# Altium PCB GardenSense_RevB.PcbDoc
Units mil, origin at the board's own origin, x right, y up, seen from the top; angles counter-clockwise.
Board outline 10012 x 650 mil, 2 copper layers (Top Layer, Bottom Layer); 30 components, 29 nets, 211 pads, 33 vias.
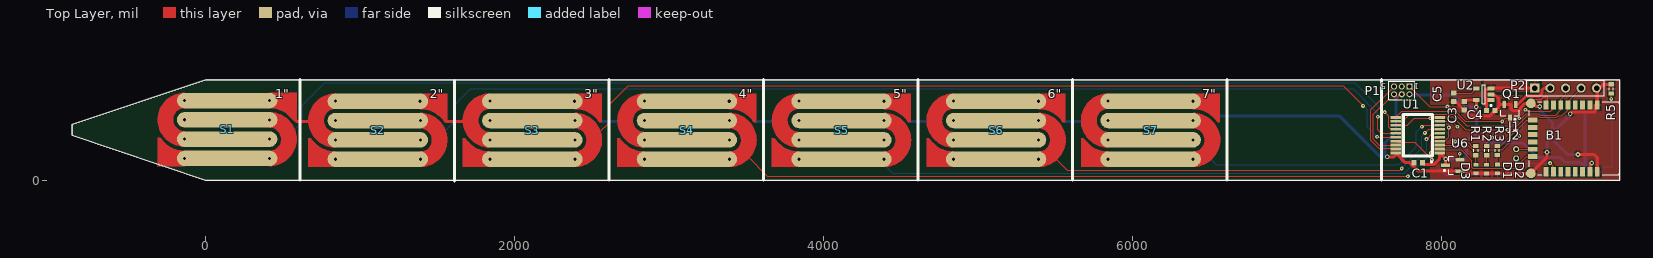
[diagram p0: Top Layer view]
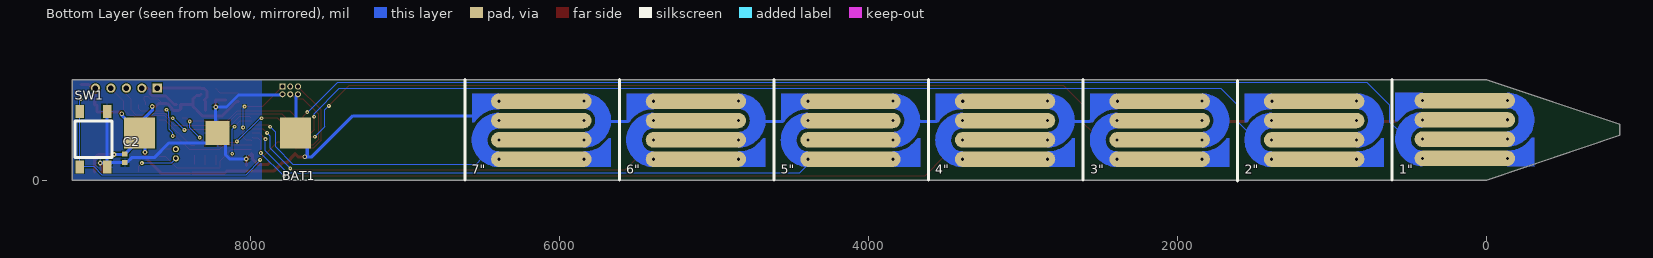
[diagram p1: Bottom Layer view, seen from below]

## Layer stack, top to bottom
Top Solder: solder mask 0.4, Solder Resist, Dk 3.5
Top Layer: signal copper 1.4
Dielectric 1: dielectric 12.6, FR-4, Dk 4.8
Bottom Layer: signal copper 1.4
Bottom Solder: solder mask 0.4, Solder Resist, Dk 3.5

## Board outline
9150,0 0,0 -862,290 -862,360 0,650 9150,650

## Design rules (kind name [scope] priority, off if disabled: settings)
Clearance [All] p1: gap=7
HoleSize [All] p1: absolutevalues=TRUE maxlimit=100 minlimit=10 maxpercent=80.000 minpercent=20.000
MinimumSolderMaskSliver [All] p1: minsoldermaskwidth=7
PolygonConnect [All] p1: connectstyle=Relief reliefconductorwidth=10 reliefentries=4 polygonreliefangle="90 Angle" airgapwidth=10
RoomDefinition GardenSense_RevB [InComponentClass('GardenSense_RevB')] p1: confinementstyle=ConfineIn formatcopy=TRUE lockcomponents=FALSE outline -860,0 9150,0 9150,650 -860,650
RoutingVias [All] p1: holewidth=15 width=30 viastyle="Through Hole" minholewidth=10 minwidth=25 maxholewidth=28 maxwidth=50
SilkToSilkClearance [All] p1 off: silktosilkclearance=10
SilkToSolderMaskClearance [IsPad] p1 off: minsilkscreentomaskgap=10 clearancetoexposedcopper=TRUE
SolderMaskExpansion [All] p1: expansion=4
Width Width_VCC [InNet('VCC')] p1: maxlimit=20 minlimit=8 preferedwidth=20
Width Width_GND [InNet('GND')] p2: maxlimit=20 minlimit=8 preferedwidth=20 minimp=50.000000 maximp=50.000000 favimp=50.000000
Width [All] p3: maxlimit=20 minlimit=8 preferedwidth=20 minimp=50.000000 maximp=50.000000 favimp=50.000000
26 further rules are at their usual default settings.

## Components (designator, comment, footprint, x,y, rotation, side; value= is the part's Value field where it differs from the comment)
B1 "RN4020" "RN4020 MODULE-24" 8790,270 r270 top
BAT1 "2032 Coin Cell" KEYSTONE_3002_2032_COINCELL 7705,305 r0 bottom
C1 "Cap Semi" 1608[0603] 7846,113 r0 top
C2 "Cap Semi" 1608[0603] 8810,140 r270 bottom
C3 "Cap Semi" 1608[0603] 8145,480 r90 top
C4 "Cap Semi" 1608[0603] 8315,450 r180 top
C5 "Cap Semi" 1608[0603] 8075,535 r90 top
D1 "LED" 603_ 8220,71.46 r180 top
D2 "LED" 603_ 8289,70.46 r180 top
D3 "LED" 603_ 8359,72.46 r180 top
J1 "TestPoint" TESTPOINT 8480,200 r0 top
J2 "TestPoint" TESTPOINT 8480,140 r0 top
P1 "MHDR2X3" MHDR2X3 7790,605 r180 top
P2 "Header 5" HDR1X5 8600,595 r0 top
Q1 "AO3420" SOT23_N 8440,445 r270 top
R1 "Res3" J1-0603 8220,190.46 r270 top
R2 "Res3" J1-0603 8290,190.46 r270 top
R3 "Res3" J1-0603 8358,191.46 r270 top
R5 "Res3" J1-0603 9095,590 r270 top
S1 "MoistureSensor" MOISTURE_2 -310,90 r0 top
S2 "MoistureSensor" MOISTURE_2 665,85 r0 top
S3 "MoistureSensor" MOISTURE_2 1665,85 r0 top
S4 "MoistureSensor" MOISTURE_2 2665,85 r0 top
S5 "MoistureSensor" MOISTURE_2 3665,85 r0 top
S6 "MoistureSensor" MOISTURE_2 4665,85 r0 top
S7 "MoistureSensor" MOISTURE_2 5665,85 r0 top
SW1 "PUSHBUTTON" PUSHBUTTON 8925,85 r0 bottom
U1 "PIC16LF1559" SSOP-20 7985,175 r180 top
U2 "MIC5205" SOT23-5_N 8270,555 r180 top
U6 "MCP9700" SOT23_M 8070,95 r180 top

## Footprints (in the part's own frame and the unit in brackets; to place one, negate y for a bottom-side part, rotate by r counter-clockwise, add the part's x,y. Pads: shape width x height; smd on the part's side, far side on the other; paste and mask are expansions set on the pad)
603_ [mm]
  rect 0.8x0.6 smd: 1(0,-0.725) 2(0,0.725)
1608[0603] [mm] "Chip Capacitor, Body 1.6x0.8mm, IPC High Density"
  rect 0.8x0.9 smd: 1(-0.7,0) 2(0.7,0)
  body extent -0.87,-0.48 0.87,0.48, height 1.3
HDR1X5 [mm] "Connector; Header; 5 Position"
  rect 1.5x1.5 hole 0.9: 1(0,0)
  round 1.5 hole 0.9: 2(2.54,0) 3(5.08,0) 4(7.62,0) 5(10.16,0)
  silkscreen extent -1.27,-1.27 11.43,1.27
J1-0603 [mm] "Chip Resistor, Body 1.6x0.8mm, IPC High Density"
  rect 0.7x0.9 smd: 1(-0.75,0) 2(0.75,0)
  silkscreen extent -0.2,-0.35 0.2,0.35, body extent -0.85,-0.48 0.85,0.48, height 0.9
KEYSTONE_3002_2032_COINCELL [mm]
  rect 3.96x3.96 smd: 1(12.825,0)
  rect 5.08x5.08 smd: 2(0,0) 2(25.65,0)
MHDR2X3 [mm] "Connector; Header; 3x2 Position"
  rect 1x1 hole 0.6: 1(0,0)
  round 1 hole 0.6: 2(0,1.27) 3(1.27,0) 4(1.27,1.27) 5(2.54,0) 6(2.54,1.27)
  silkscreen extent -0.9,-0.9 3.44,2.17
MOISTURE_2 [mil]
  round 30 hole 20: 0(175,175.13) 0(175.01,425.36) 0(723.64,424.77) 0(725,175) 1(175,300) 1(175,49.88) 1(725,49.64) 1(725,299.87)
  oval 650x100 smd paste-1000: 0(449.93,424.51) 0(450,175) 1(450,50) 1(450,300)
  oval 650x100 smd far side paste-1000: 0(449.93,424.51) 0(450,175) 1(450,50) 1(450,300)
  Top Layer region: 175,100 91.86,118.66 26.27,173.04 26.27,173.04 15.67,184.64 0,184.64 0,175 0,0 175,0
  Top Layer region: 725,349.75 812.05,325.67 875.92,261.8 900,174.75 900,174.75 875.92,87.7 812.05,23.83 725,-0.25 725,-0.25 725,99.75 753.95,105.02 778.51,121.24 794.73,145.79 800,174.75 800,174.75 789.46,211.9 762.15,239.21 725,249.75 725,249.75
  Top Layer region: 175,125.25 87.95,149.33 24.08,213.2 0,300.25 0,300.25 24.08,387.3 87.95,451.17 175,475.25 175,475.25 175,375.25 146.05,369.98 121.49,353.76 105.27,329.21 100,300.25 100,300.25 110.54,263.1 137.85,235.79 175,225.25 175,225.25
  Top Layer region: 723.64,374.66 809.98,354.39 876.55,295.78 876.56,295.78 882.97,290.02 898.64,290.02 898.64,299.66 898.64,474.66 723.64,474.66
  Bottom Layer region: 175,100 91.86,118.66 26.27,173.04 26.27,173.04 15.67,184.64 0,184.64 0,175 0,0 175,0
  Bottom Layer region: 725,349.75 812.05,325.67 875.92,261.8 900,174.75 900,174.75 875.92,87.7 812.05,23.83 725,-0.25 725,-0.25 725,99.75 753.95,105.02 778.51,121.24 794.73,145.79 800,174.75 800,174.75 789.46,211.9 762.15,239.21 725,249.75 725,249.75
  Bottom Layer region: 175,125.25 87.95,149.33 24.08,213.2 0,300.25 0,300.25 24.08,387.3 87.95,451.17 175,475.25 175,475.25 175,375.25 146.05,369.98 121.49,353.76 105.27,329.21 100,300.25 100,300.25 110.54,263.1 137.85,235.79 175,225.25 175,225.25
  Bottom Layer region: 723.64,374.66 809.98,354.39 876.56,295.78 876.56,295.78 882.97,290.02 898.64,290.02 898.64,299.66 898.64,474.66 723.64,474.66
PUSHBUTTON [mm] "TE 5-1437565-0"
  rect 1.4x2.1 smd: 1(4.5,-9.1) 1(4.5,0) 2(0,-9.1) 2(0,0)
  silkscreen extent -0.8,-7.57 5.3,-1.55
"RN4020 MODULE-24" [mm]
  rect 1.5x0.8 smd: 1(-5.5,5.45) 2(-5.5,4.25) 3(-5.5,3.05) 4(-5.5,1.85) 5(-5.5,0.65) 6(-5.5,-0.55) 7(-5.5,-1.75) 8(-5.5,-2.95) 17(5.5,-2.95) 18(5.5,-1.75) 19(5.5,-0.55) 20(5.5,0.65) 21(5.5,1.85) 22(5.5,3.05) 23(5.5,4.25) 24(5.5,5.45)
  round 1.6 smd: 9(-5.75,-5.45) 16(5.75,-5.45)
  rect 0.8x1.5 smd: 10(-3,-5.15) 11(-1.8,-5.15) 12(-0.6,-5.15) 13(0.6,-5.15) 14(1.8,-5.15) 15(3,-5.15)
  silkscreen extent -6,-5.75 6,9.1, body extent -5.75,-5.45 5.75,14.05, height 2.3
SOT23-5_N [mm] "SOT23, 6-Leads, Body 2.9x1.6mm, Pitch 0.95mm, Lead Span 2.7mm, IPC Medium Density"
  rect 1.1x0.65 smd: 1(-1.2,0.95) 2(-1.2,0) 3(-1.2,-0.95) 4(1.2,-0.95) 5(1.2,0.95)
  silkscreen extent -1.33,-1.55 0.25,1.95, body extent -0.9,-1.55 0.9,1.55, height 1.45
SOT23_M [mm] "SOT23, 3-Leads, Body 2.9x1.3mm, Pitch 0.95mm, Lead Span 2.3mm - Reverse Pinning, IPC Low Density"
  rect 1.45x0.6 smd: 1(1.175,0) 2(-1.175,-0.95) 3(-1.175,0.95)
  silkscreen extent -0.1,-1.5 1.47,1.5, body extent -0.7,-1.5 0.7,1.5, height 1.1
SOT23_N [mm] "SOT23, 3-Leads, Body 2.9x1.3mm, Pitch 0.95mm, Lead Span 2.3mm - Reverse Pinning, IPC Medium Density"
  rect 1.15x0.6 smd: 1(1.125,0) 2(-1.125,-0.95) 3(-1.125,0.95)
  silkscreen extent -0.2,-1.5 1.47,1.5, body extent -0.7,-1.5 0.7,1.5, height 1.1
SSOP-20 [mm]
  rect 1.75x0.45 smd: 1(0,0) 2(0,-0.65) 3(0,-1.3) 4(0,-1.95) 5(0,-2.6) 6(0,-3.25) 7(0,-3.9) 8(0,-4.55) 9(0,-5.2) 10(0,-5.85) 11(7.2,-5.85) 12(7.2,-5.2) 13(7.2,-4.55) 14(7.2,-3.9) 15(7.2,-3.25) 16(7.2,-2.6) 17(7.2,-1.95) 18(7.2,-1.3) 19(7.2,-0.65) 20(7.2,0)
  silkscreen extent 1.2,-6.35 5.98,1.63
TESTPOINT [mm]
  round 1 hole 0.6: 1(0,0)

## Part data
C1 C2 C3 C4 C5: "Capacitor (Semiconductor SIM Model)"
P1: "Header, 3-Pin, Dual row"
P2: "Header, 5-Pin"
R1 R2 R3 R5: "Resistor"
SW1: "TE 5-1437565-0"

## Via types
v1: diameter 25, hole 10, Top Layer to Bottom Layer, 25 vias
v2: diameter 30, hole 15, Top Layer to Bottom Layer, 8 vias

## Nets (pads, with @x,y where several pads share a name; then routed paths per layer and width w, separated by ;. In a path a pad name is that pad's centre, name@x,y a point inside that pad or via, vN(x,y) a via of type N, cw(c..) or ccw(c..) an arc to the next point about the centre after c; other vN are vias at no path point)
CONNECT: B1.10 R3.1 | length 298.5
  Top Layer w8: R3.1 8380.98,220.98 8548.11,388.11 B1.10
CTS: B1.14 J1.1 | length 107.6
  Top Layer w8: J1.1 8480.87,199.13 B1.14
GND: B1.1 B1.8 B1.9 B1.16 B1.24 BAT1.2 C1.1 C2.1 C3.1 C4.1 C5.1 D1.2 D2.2 D3.2 P1.6 P2.5 Q1.2 R5.1 S1.0 S2.0 S3.0 S4.0 S5.0 S6.0 S7.0 U1.20 U2.2 U6.3 | length 6021.4
  Top Layer w8: B1.9 8575.43,504.31 8595,523.87 8641.67,523.87 8657.8,540 8685,540 8685,515 8673.86,503.86 B1.8
  Top Layer w20: 575,395 590,380 675,380 ; 1550,385 1555,380 1685,380 ; v2(7645,150) 7690,150 7710,170 7710,166.53 7763.53,113 7792,113 7847.4,57.6 U6.3 8151.26,57.6 8164.94,43.91 D3.2@8372,43.91 ; C5.1 8090,507.44 8110.28,487.16 8110.28,484.77 8180.05,415 8310,415 8342.56,447.56 C4.1 8370,477.44 8370,490 ; U2.2 8324.85,547.39 8345.94,547.39 8370,523.33 8370,490 ; 8387.29,43.62 B1.16 8680,148.19 v2(8680,180) ; v2(8632.27,475.5) 8609.5,475.5 8588.62,496.38 B1.9 8536.38,496.38 8506.21,466.21 8506.21,459.61 8496.25,449.65 8458.55,449.65 8448.59,459.61 8448.59,489.29 Q1.2 8370.71,489.29 8370,490 ; v2(8830,430) 8840.01,440.01 8990.07,440.01 8990.07,486.53 B1.1 9004.57,590.43 P2.5 9020,595 9044.53,619.53 R5.1 ; v2(8880,165) 8985,165 9004.57,145.43 B1.24
  Bottom Layer w20: 2545,400 2565,380 2680,380 ; 3540,400 3560,380 3675,380 ; 4555,380 4680,380 ; 5555,380 5680,380 ; 6550,415 7335,415 7600,150 v2@7630,150 ; v2(7645,150) v2@7630,150 ; P1.6 7703.31,541.69 7703.31,313.31 7630,240 v2@7630,150 ; BAT1.2@7720,295 BAT1.2@7720,305 ; v2(8632.27,475.5) 8630,473.23 8630,455 8714.84,370.16 BAT1.2@8714.84,305 ; v2(8680,180) 8680,260.16 8675,265.16 BAT1.2@8714.84,305 ; v2(8830,430) 8830,420.16 BAT1.2@8714.84,305 ; v2(8880,165) 8812.56,165 C2.1 8714.84,262.72 BAT1.2@8714.84,305
LED1: R1.1 U1.13 | length 612
  Top Layer w8: U1.13 7775.87,354.13 7821.73,400 v1(7925,400) ; v1(8085,250) 8095,240 8174.14,240 8194.16,219.98 R1.1
  Bottom Layer w8: v1(7925,400) 7935,400 v1(8085,250)
LED2: Q1.1 R2.1 U1.11 | length 991.8
  Top Layer w8: U1.11 7741.22,445 8086.21,445 8151.21,380 v1(8390,380) 8410.71,400.71 Q1.1 ; R2.1 8290,240 v1(8325,275)
  Bottom Layer w8: v1(8325,275) 8390,340 v1(8390,380)
M1: S1.1 U1.14 | length 7499.2
  Top Layer w8: v1(7630,440) 7656.09,413.91 7656.09,340.72 7662.53,334.27 7695.8,334.27 U1.14
  Bottom Layer w8: 565,315 625,375 625,485 770,630 7435,630 7625,440 v1(7630,440)
M2: S2.1 U1.15 | length 6519.4
  Top Layer w8: v1(7585,410) 7585,325 7607.05,302.95 U1.15
  Bottom Layer w8: 1540,310 1615,385 1615,490 1715,590 7425,590 7585,430 v1(7585,410)
M3: S3.1 U1.16 | length 5553.3
  Top Layer w8: 2545,305 2615,375 2615,490 2735,610 7360,610 v1(7490,480) ; v1(7580,280) 7582.64,277.36 U1.16 U1.16@7701.54,276.5
  Bottom Layer w8: v1(7490,480) 7515,455 7515,345 v1(7580,280)
M4: S4.1 U1.5 | length 4678.5
  Top Layer w8: 3510,150 3635,25 v1(7780,25) ; v1(7930,175) 7930,255.63 7945.99,271.63 7979.27,271.63 U1.5
  Bottom Layer w8: v1(7780,25) v1(7930,175)
M5: S5.1 U1.6 | length 3803.2
  Top Layer w8: v1(7900,265) 7937.95,302.95 U1.6
  Bottom Layer w8: S5.1@4390,134.64 4401.07,123.57 4401.07,88.93 4445,45 7755,45 7900,190 v1(7900,265)
M6: S6.1 U1.7 | length 2679.2
  Top Layer w8: 5495,145 5575,65 7730,65 v1(7740,75) ; v1(7890,305) 7913.54,328.54 U1.7
  Bottom Layer w8: v1(7740,75) 7870,205 7870,285 v1(7890,305)
M7: S7.1 U1.8 | length 1662.5
  Top Layer w8: v1(7870,345) 7879.13,354.13 U1.8
  Bottom Layer w8: 6500,140 6540,100 7720,100 7835,215 7835,310 v1(7870,345)
NetC5_2: C5.2 U2.4 | length 160.1
  Top Layer w8: C5.2 8192.91,562.56 U2.4
NetD1_1: D1.1 R1.2 | length 60.9
  Top Layer w8: D1.1 R1.2
NetD2_1: D2.1 R2.2 | length 60.9
  Top Layer w8: D2.1@8290,100 R2.2
NetD3_1: D3.1 R3.2 | length 59.9
  Top Layer w8: D3.1@8358,102 R3.2
NetP1_1: P1.1 U1.4 | length 570.6
  Top Layer w8: P1.1 7920,475 v1(8035,475) ; U1.4 7990.73,257.5 8024,257.5 8045,278.5 v1(8045,340)
  Bottom Layer w8: v1(8035,475) 8045,465 v1(8045,340)
NetP1_4: P1.4 U1.18 | length 568.9
  Top Layer w8: U1.18 7593.82,226.18 7555,265 7555,425 7654.31,524.31 7702.71,524.31 7720.69,542.29 7720.69,555 P1.4
NetP1_5: P1.5 U1.19 | length 597.3
  Top Layer w8: P1.5 7540,455 7540,258.79 7592.46,206.32 7701.54,206.32 U1.19
NetP2_2: P2.2 Q1.3 | length 279.9
  Top Layer w20: Q1.3 8491.11,489.29 8546.69,544.87 8632.97,544.87 8646.53,558.43 8646.53,581.53 8660,595 P2.2
NetR5_2: R5.2 SW1.1 U1.17 | length 1999.9
  Top Layer w8: U1.17@7703.31,250 7707.27,246.04 7823.96,246.04 7935,135 v1(7935,130) ; v1(9095,525) R5.2
  Bottom Layer w8: v1(7935,130) 7931,130 8028.34,32.66 8957.11,32.66 9009.45,85 9102.17,85 9102.17,443.27 9102.17,517.83 v1(9095,525)
RTS: B1.18 J2.1 | length 297.7
  Top Layer w8: v1(8700,110) 8721.1,88.9 B1.18
  Bottom Layer w8: J2.1 8510,110 v1(8700,110)
RX: B1.6 P2.3 U1.10 | length 1033.2
  Top Layer w8: U1.10@7990.73,399.58 8001.15,410 8068.23,410 8153.23,325 v1(8425,325) ; v1(8500,400) 8517.09,400 8546.95,429.86 8627.54,429.86 8637.4,420 8735,420 8768.35,453.35 B1.6 8768.35,523.35 8800,555 P2.3
  Bottom Layer w8: v1(8425,325) v1(8500,400)
TEMP4: U1.9 U6.2 | length 348.6
  Top Layer w8: U1.9@7985.27,380 8065,380 v1(8100,345) ; v1(8115,170) 8116.26,168.74 U6.2
  Bottom Layer w8: v1(8100,345) 8115,330 v1(8115,170)
TX: B1.5 P2.4 U1.12 | length 1390.3
  Top Layer w8: U1.12 7744.72,379.72 7790.17,425.17 8084.83,425.17 8160,350 8488.3,350 8553.16,414.86 8621.33,414.86 8631.19,405 8741.21,405 8751.07,414.86 8774.86,414.86 8815.59,455.59 B1.5 8815.59,510.59 P2.4
VCC: B1.23 BAT1.1 C1.2 C2.2 C3.2 P1.2 SW1.2 U1.1 U2.5 U6.1 | length 2589.4
  Top Layer w8: 7985,165 U1.1@7990,170
  Top Layer w20: C1.2 7886.56,100 7946.72,100 7985,138.28 7985,165 ; U1.1@7990,170 v2(8023.74,136.26) U6.1 ; C3.2@8155.04,517.6 U2.5 v2(8222.76,472.76) ; B1.23 8957.32,102.32 8965,110 v2(8970,110)
  Bottom Layer w20: P1.2 7795,550 8075,550 8152.24,472.76 v2(8222.76,472.76) 8222.76,317.83 BAT1.1 ; v2(8023.74,136.26) 8022.48,135 8130,135 8160,165 8160,255.08 BAT1.1 ; C2.2@8795.56,115 8765.56,145 8620,145 8525,240 8274.92,240 BAT1.1 ; C2.2 8897.56,112.44 SW1.2@8925,85 ; SW1.2@8925,443.27 SW1.2@8925,85 ; v2(8970,110) 8950,110 SW1.2@8925,85
VIN: C4.2 P2.1 U2.1 U2.3 | length 465.5
  Top Layer w20: C4.2 8287.44,508.88 8296.16,517.6 8278.59,535.16 8278.59,574.84 8296.16,592.4 U2.3 8319.84,595 P2.1
WAKE_HW: B1.15 U1.2 | length 709.4
  Top Layer w8: U1.2 7990.73,194.86 8123.38,194.86 8193.25,124.98 8193.25,83.63 8200.7,76.19 8471.19,76.19 8546.89,151.89 B1.15
WAKE_SW: B1.7 U1.3 | length 967
  Top Layer w8: U1.3@7986.18,225 8167.93,225 8197.93,195 8390,195 8480,285 v1(8500,285) ; v1@8545,455 8554.99,445.01 8705,445.01 8721.1,461.11 B1.7
  Top Layer w10: v1(8540,455) v1@8545,455
  Bottom Layer w8: v1(8500,285) 8500,305 8523.5,328.5 8523.5,403.5 ; 8524.5,403.5 8524.5,439.5 v1(8540,455)
pads on no net: B1.2 B1.3 B1.4 B1.11 B1.12 B1.13 B1.17 B1.19 B1.20 B1.21 B1.22 P1.3

## Polygon pours and split planes (outlines as drawn)
VCC on Bottom Layer "VCC_POLY" (solid, pour order 3): 7925,650 7925,0 9150,0 9150,650
VIN on Top Layer "VIN_Poly" (solid, pour order 9): 8275,650 8270,650 8270,645 8270,450 8300,450 8300,485 8300,570 8625,570 8625,650
GND on Top Layer "GND_Poly" (solid, pour order 7): 9150,0 7925,0 7925,650 8250,650 8250,425 8325,425 8325,475 8350,475 8350,550 8650,550 8650,650 9150,650

## Silkscreen, mask and mechanical layers (free items; w line width, h text height)
Top Overlay:
  lines w1: -862,290 0,0 9150,0 9150,650 0,650 -862,360 -862,290
  lines w20: 610,0 610,650 ; 1610,-5 1610,645 ; 2610.19,0 2610.19,650 ; 3610,0 3610,650 ; 4610,0 4610,650 ; 5610,0 5610,650 ; 6610,0 6610,650 ; 7610,0 7610,650
  text "1\"" at 450,530 h60
  text "2\"" at 1450,530 h60
  text "3\"" at 2450,530 h60
  text "4\"" at 3450,530 h60
  text "5\"" at 4450,530 h60
  text "6\"" at 5450,530 h60
  text "7\"" at 6450,530 h60
Bottom Overlay:
  lines w20: 610,0 610,650 ; 1610,-5 1610,645 ; 2610.19,0 2610.19,650 ; 3610,0 3610,650 ; 4610,0 4610,650 ; 5610,0 5610,650 ; 6610,0 6610,650
  text "1\"" at 565,40 h60
  text "2\"" at 1565,40 h60
  text "3\"" at 2565,40 h60
  text "4\"" at 3565,40 h60
  text "5\"" at 4565,40 h60
  text "6\"" at 5565,40 h60
  text "7\"" at 6565,40 h60

## Text inside footprints (layer, text, board x,y; h text height)
P1: Top Overlay "1" at 7852.99,625 h39.37 r180; Top Overlay "5" at 7640.39,625 h39.37 r180